# Altium PCB AC_Dimmer_PCB.pcbdoc
Units mil, origin at the board's own origin, x right, y up, seen from the top; angles counter-clockwise.
Board outline 3704.4 x 2927.2 mil, 2 copper layers (Top Layer, Bottom Layer); 13 components, 17 nets, 41 pads, 0 vias.
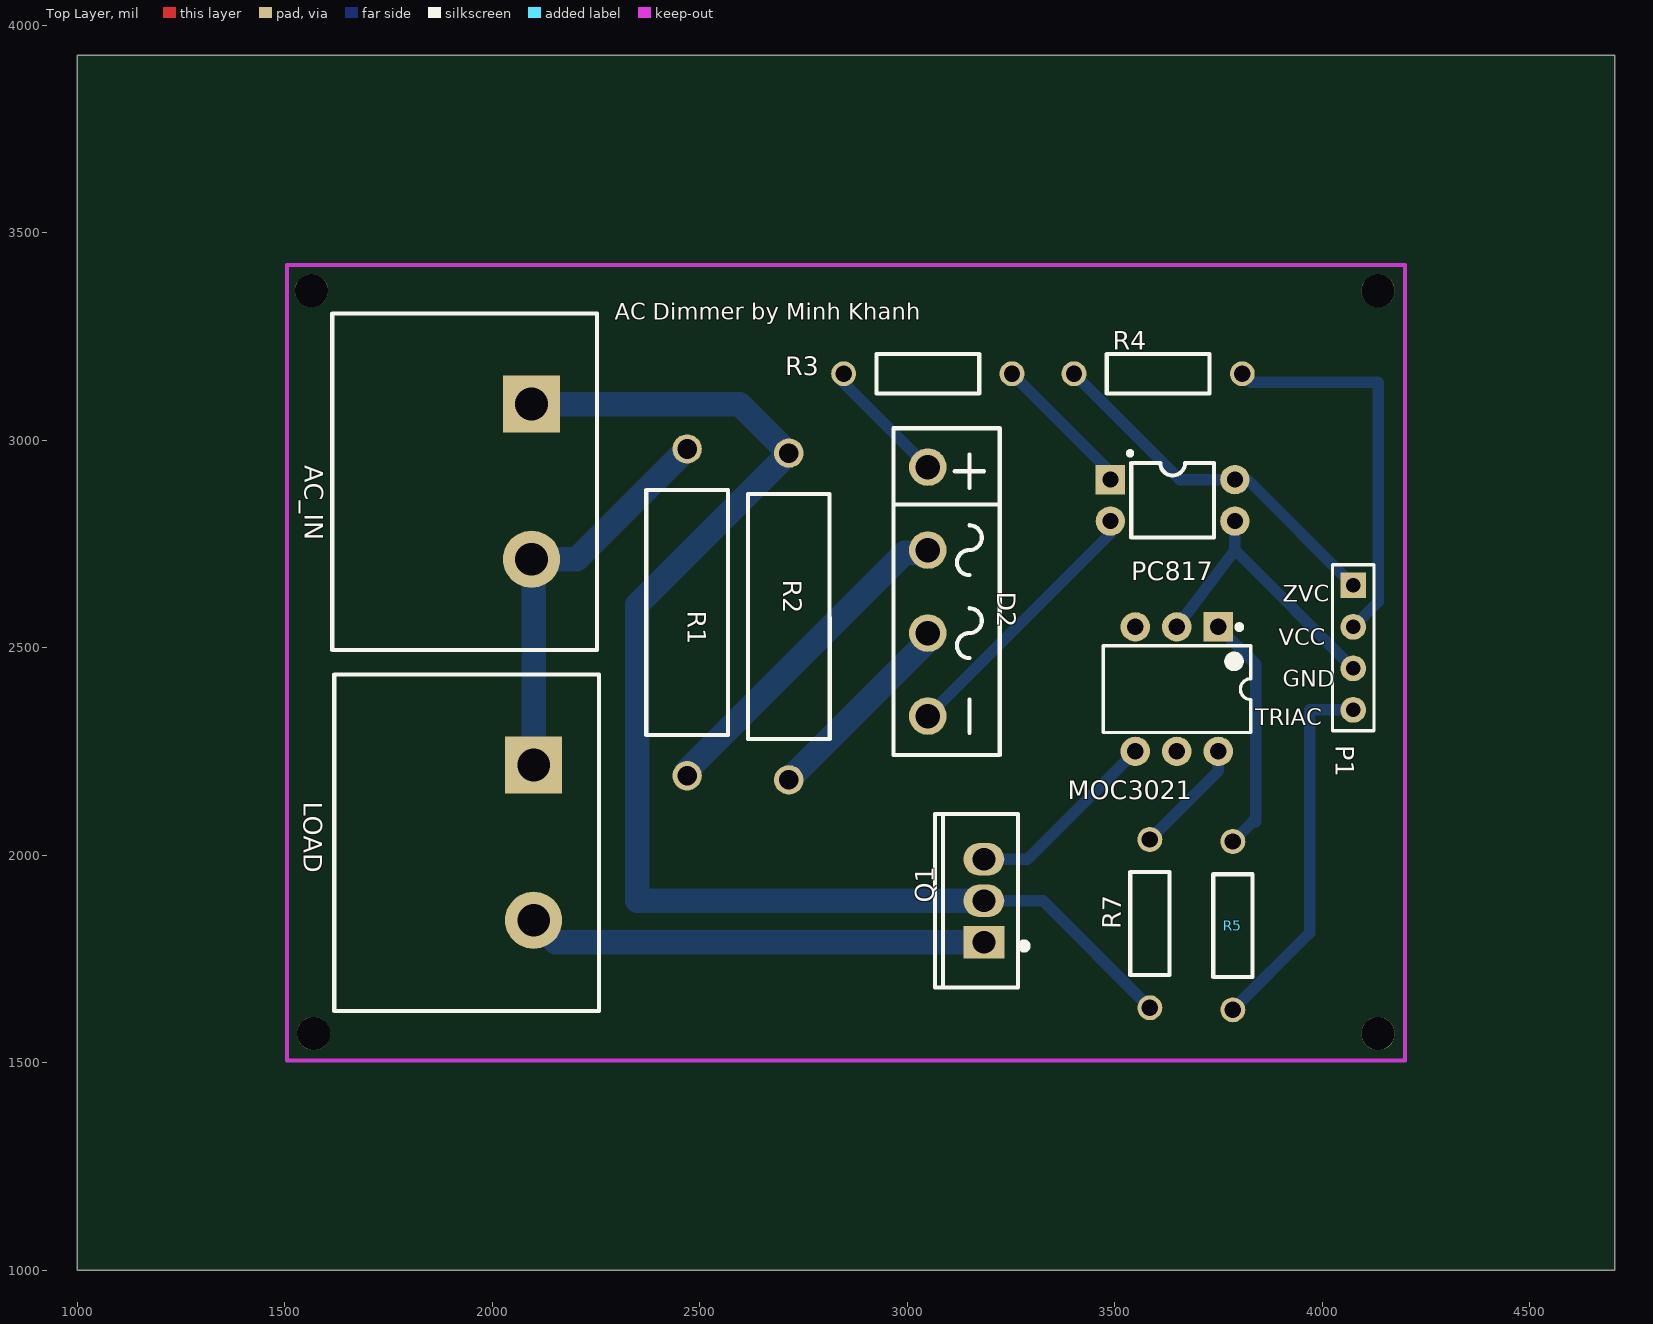
[diagram p0: Top Layer view]
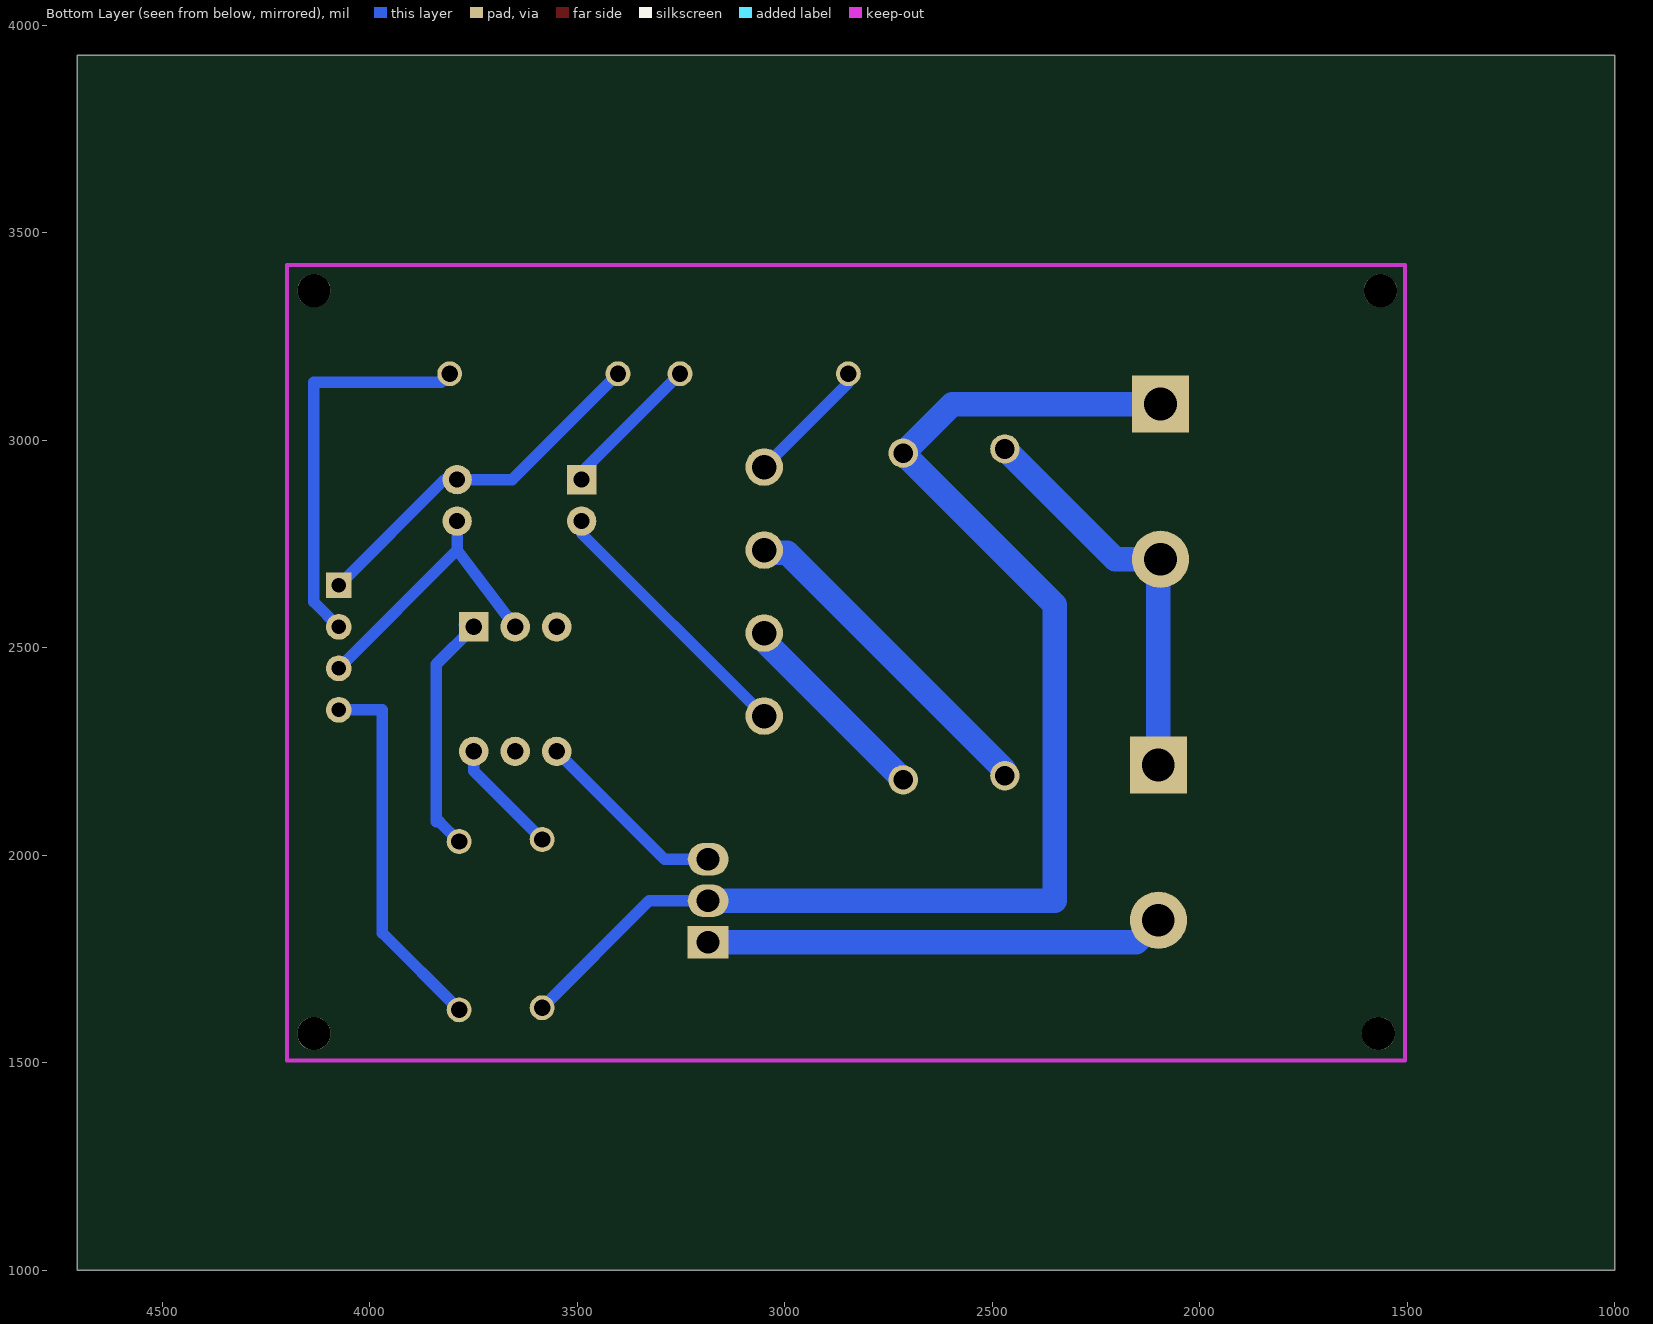
[diagram p1: Bottom Layer view, seen from below]

## Layer stack, top to bottom
Top Solder: solder mask 0.4, Solder Resist, Dk 3.5
Top Layer: signal copper 1.4
Dielectric1: dielectric 12.6, FR-4, Dk 4.8
Bottom Layer: signal copper 1.4
Bottom Solder: solder mask 0.4, Solder Resist, Dk 3.5

## Board outline
4704.4,1000 1000,1000 1000,3927.2 4704.4,3927.2

## Design rules (kind name [scope] priority, off if disabled: settings)
Clearance [All] p1: gap=10 ignorepadtopadclearanceinfootprint=FALSE except(0: Arc-Hole Track-Hole SMDPad-Hole THPad-Hole Via-Hole Fill-Hole Poly-Hole Region-Hole Text-Hole)
PolygonConnect [All] p1: connectstyle=Relief reliefconductorwidth=10 reliefentries=4 polygonreliefangle="90 Angle" airgapwidth=10
RoutingVias [All] p1: holewidth=28 width=50 viastyle="Through Hole" minholewidth=28 minwidth=50 maxholewidth=28 maxwidth=50
SolderMaskExpansion [All] p1: expansion=4 istentingtop=FALSE
Width [All] p1: maxlimit=10 minlimit=10 preferedwidth=10
30 further rules are at their usual default settings.

## Components (designator, comment, footprint, x,y, rotation, side; value= is the part's Value field where it differs from the comment)
AC_IN "HB9500-2P" CONN-TH_HB9500SS-9.5-2P 2094.4,2900 r270 top
D2 "KBL410" DIO-BG-TH_RS-4L 3049.4,2635 r270 top
LOAD "HB9500-2P" CONN-TH_HB9500SS-9.5-2P 2099.4,2030 r270 top
MOC3021 "MOC3021" DIP-6_L8.5-W6.4-P2.54-LS7.6-BL 3649.4,2400 r180 top
P1 "Header-Female-2.54_1x4" HDR-4X1/2.54 4074.4,2500 r270 top
PC817 "PC817" DIP-4_L6.4-W4.6-P2.54-LS7.6-BL 3639.4,2855 r270 top
Q1 "BTA20" TO-220F-3_L10.2-W4.9-P2.54-L 3184.4,1890 r90 top
R1 "47K" RES-TH_BD4.5-L11.0-P15.00-D0.8 2469.4,2585 r270 top
R2 "47K" RES-TH_BD4.5-L11.0-P15.00-D0.8 2714.4,2575 r270 top
R3 "1K" RES-TH_BD2.4-L6.3-P10.30-D0.6 3049.4,3160 r0 top
R4 "10K" RES-TH_BD2.4-L6.3-P10.30-D0.6 3604.4,3160 r180 top
R5 "330" RES-TH_BD2.4-L6.3-P10.30-D0.6 3784.4,1830 r270 top
R7 "330" RES-TH_BD2.4-L6.3-P10.30-D0.6 3584.4,1835 r90 top

## Footprints (in the part's own frame and the unit in brackets; to place one, negate y for a bottom-side part, rotate by r counter-clockwise, add the part's x,y. Pads: shape width x height; smd on the part's side, far side on the other; paste and mask are expansions set on the pad)
CONN-TH_HB9500SS-9.5-2P [mm]
  rect 3.5x3.5 hole 2: 1(-4.75,0)
  round 3.5 hole 2: 2(4.75,0)
  silkscreen extent -10.3,-12.2 10.3,4
DIO-BG-TH_RS-4L [mm]
  round 2.3 hole 1.5: 1(-7.62,0) 2(-2.54,0) 3(2.54,0) 4(7.62,0)
  silkscreen extent -10,-2.1 10,4.4
DIP-4_L6.4-W4.6-P2.54-LS7.6-BL [mm]
  rect 1.8x1.8 hole 1: 1(-1.27,-3.81)
  round 1.8 hole 1: 2(1.27,-3.81) 3(1.27,3.81) 4(-1.27,3.81)
  silkscreen extent -3,-2.73 2.29,2.54
DIP-6_L8.5-W6.4-P2.54-LS7.6-BL [mm]
  rect 1.8x1.8 hole 1: 1(-2.54,-3.81)
  round 1.8 hole 1: 2(0,-3.81) 3(2.54,-3.81) 4(2.54,3.81) 5(0,3.81) 6(-2.54,3.81)
  silkscreen extent -4.52,-3.95 4.5,2.65
HDR-4X1/2.54 [mil]
  rect 62x62 hole 35: 1(-150,0)
  round 62 hole 35: 2(-50,0) 3(50,0) 4(150,0)
  silkscreen extent -200,-50 200,50
RES-TH_BD2.4-L6.3-P10.30-D0.6 [mil]
  round 60 hole 39.37: 1(-202.76,0) 2(202.76,0)
  silkscreen extent -124,-47 124,47
RES-TH_BD4.5-L11.0-P15.00-D0.8 [mm]
  round 1.8 hole 1.2: 1(-10,0) 2(10,0)
  silkscreen extent -7.5,-2.5 7.5,2.5
TO-220F-3_L10.2-W4.9-P2.54-L [mm]
  rect 2x2.5 hole 1.4: 1(-2.54,0)
  oval 2x2.5 hole 1.4: 2(0,0) 3(2.54,0)
  silkscreen extent -5.3,-2.66 5.3,3

## Free pads (board coordinates)
  round 80 hole 80 unplated: ""(1564.4,3360) ""(1569.4,1570) ""(4134.4,1570) ""(4134.4,3360)

## Nets (pads, with @x,y where several pads share a name; then routed paths per layer and width w, separated by ;. In a path a pad name is that pad's centre, name@x,y a point inside that pad or via, vN(x,y) a via of type N, cw(c..) or ccw(c..) an arc to the next point about the centre after c; other vN are vias at no path point)
AC_IN_1: AC_IN.1 Q1.2 R2.1 R7.1 | length 3240.7
  Bottom Layer w27.56: Q1.2 3326.64,1890 R7.1
  Bottom Layer w59.05: AC_IN.1 2596.09,3087.01 R2.1 2349.4,2603.7 2349.4,1890 Q1.2
AC_IN_2: AC_IN.2 LOAD.1 R1.1 | length 983.1
  Bottom Layer w59.05: LOAD.1 2099.4,2707.99 AC_IN.2 2203.69,2712.99 R1.1
D2_1: D2.1 R3.1 | length 309
  Bottom Layer w27.56: R3.1 2846.64,3137.76 D2.1
LOAD_2: LOAD.2 Q1.1 | length 1107
  Bottom Layer w59.05: LOAD.2 2152.39,1790 Q1.1
MOC3021_1: MOC3021.1 R5.1 | length 608.9
  Bottom Layer w23.62: MOC3021.1 3769.4,2550 MOC3021.1@3774.4,2555
  Bottom Layer w27.56: MOC3021.1 3839.4,2460 3839.4,2080 3831.64,2080 R5.1
MOC3021_3: MOC3021.3
MOC3021_4: MOC3021.4 Q1.3 | length 472.7
  Bottom Layer w27.56: Q1.3 3289.4,1990 MOC3021.4
MOC3021_5: MOC3021.5
MOC3021_6: MOC3021.6 R7.2 | length 280.6
  Bottom Layer w27.56: R7.2 3749.4,2202.76 MOC3021.6
P1_2: P1.2 R4.1 | length 950.3
  Bottom Layer w27.56: R4.1 3827.2,3140 4134.4,3140 4134.4,2610 P1.2
P1_4: P1.4 R5.2 | length 904.4
  Bottom Layer w27.56: R5.2 3969.4,1812.24 3969.4,2350 P1.4
PC817_1: PC817.1 R3.2 | length 353.3
  Bottom Layer w27.56: R3.2 3489.4,2922.76 PC817.1
PC817_2: D2.4 PC817.2 | length 652.3
  Bottom Layer w27.56: D2.4 3489.4,2775 PC817.2
PC817_3: MOC3021.2 P1.3 PC817.3 | length 775.1
  Bottom Layer w27.56: MOC3021.2 3789.4,2735 ; P1.3 3789.4,2735 ; 3789.4,2735 PC817.3 3789.4,2735
PC817_4: P1.1 PC817.4 R4.2 | length 884
  Bottom Layer w27.56: R4.2 3656.64,2905 PC817.4 3819.4,2905 P1.1
R1_2: D2.2 R1.2 | length 812.9
  Bottom Layer w59.05: R1.2 2471.66,2193.56 2471.66,2206.66 2993.97,2728.97 3043.37,2728.97 D2.2
R2_2: D2.3 R2.2 | length 492.5
  Bottom Layer w59.05: R2.2 3049.4,2516.3 D2.3

## Silkscreen, mask and mechanical layers (free items; w line width, h text height)
Top Overlay:
  text "AC Dimmer by Minh Khanh" at 2294.4,3290.32 h39.37
  text "ZVC" at 3904.4,2610.32 h39.37
  text "VCC" at 3894.4,2505.32 h39.37
  text "GND" at 3904.4,2405.32 h39.37
  text "TRIAC" at 3838,2313 h39.37